# Altium PCB HX-SMJ-02.pcbdoc
Units mm, origin at the board's own origin, x right, y up, seen from the top; angles counter-clockwise.
Board outline 105.79 x 116.08 mm, 2 copper layers (Top Layer, Bottom Layer); 78 components, 54 nets, 295 pads, 193 vias.
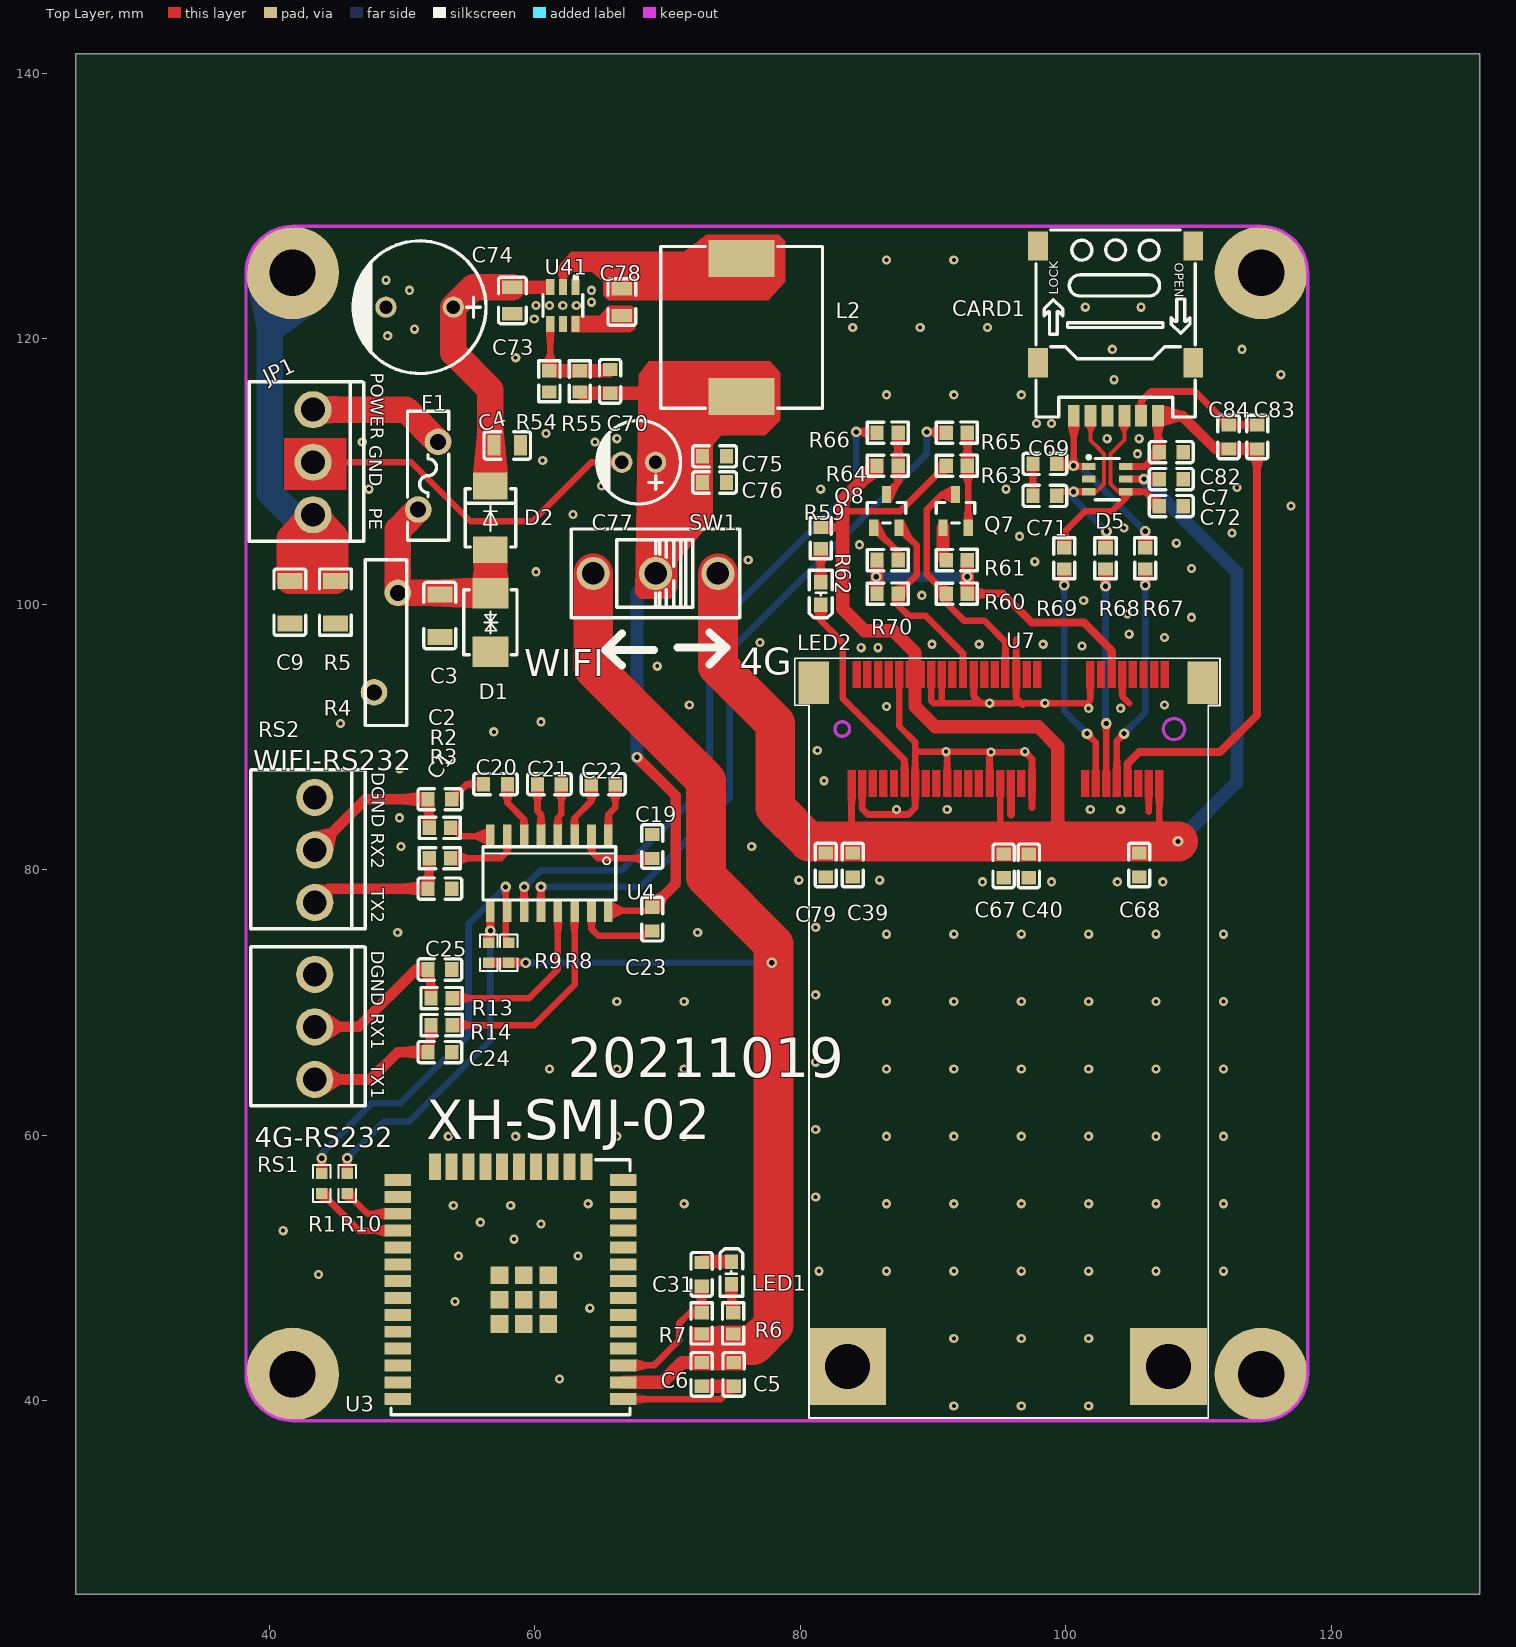
[diagram p0: Top Layer view]
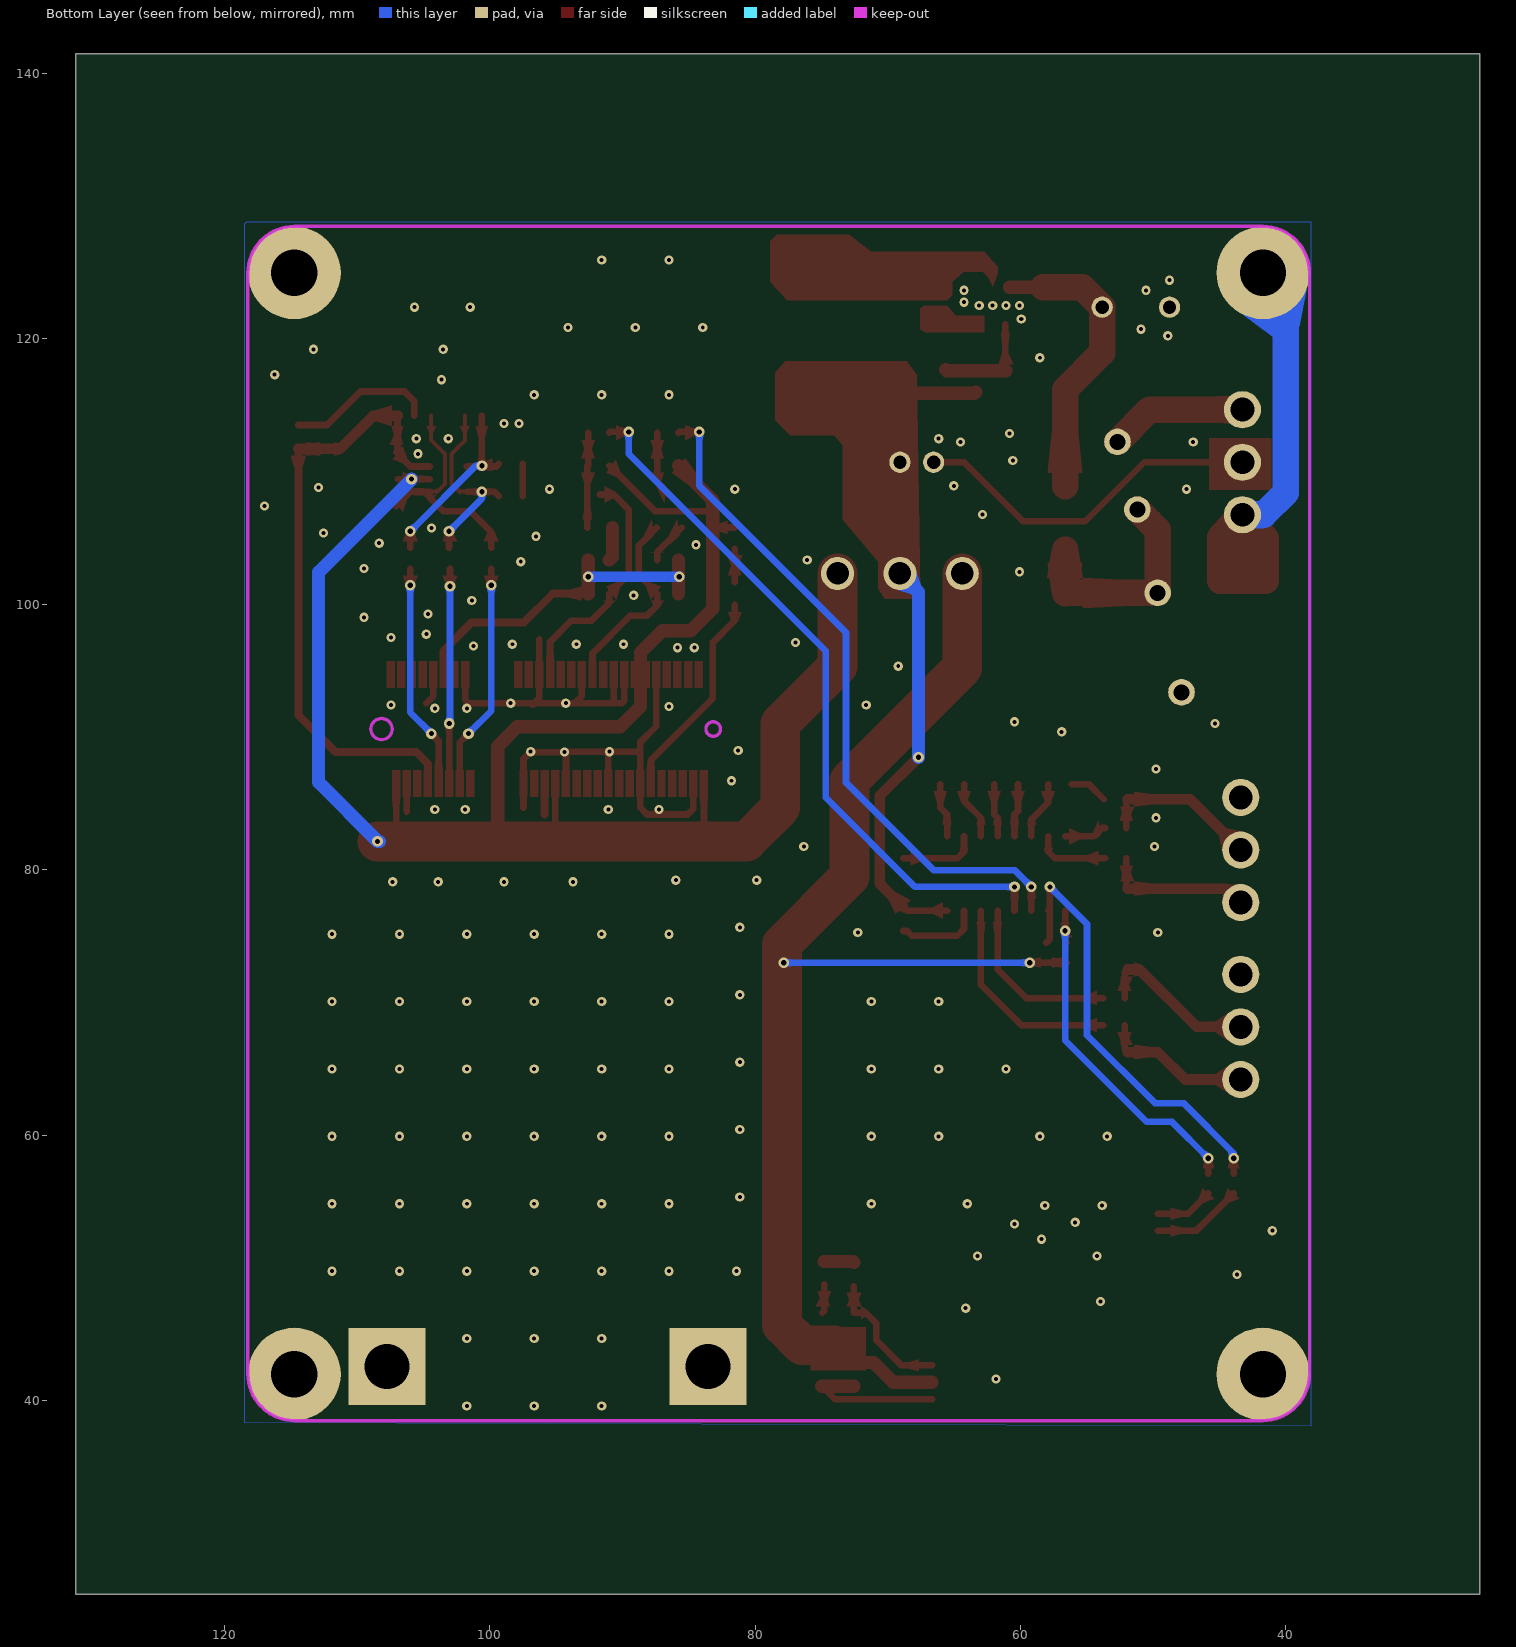
[diagram p1: Bottom Layer view, seen from below]

## Layer stack, top to bottom
Top Layer: signal copper (thickness not stored)
Dielectric: dielectric 0.32, FR-4, Dk 4.8
Bottom Layer: signal copper (thickness not stored)

## Board outline
131.191,25.4 25.4,25.4 25.4,141.478 131.191,141.478

## Components (designator, comment, footprint, x,y, rotation, side; value= is the part's Value field where it differs from the comment)
C1 "11pF" C0603 52.832,78.57 r0 top
C2 "11pF" C0603 52.832,85.301 r0 top
C3 "1nF/2kv" C1206 52.832,99.144 r90 top
C4 "100nF/50v" C0805 57.912,111.971 r180 top
C5 "100nF" C0603 74.97,41.966 r90 top
C6 "33pF" C0603 72.557,41.966 r90 top
C7 "100nF" C0603 107.95,109.431 r180 top
C9 "1nF/2kv" C1206 41.529,100.16 r270 top
C19 "100nF" C0603 68.834,81.745 r90 top
C20 "100nF" C0603 57.023,86.444 r0 top
C21 "100nF" C0603 61.087,86.444 r0 top
C22 "100nF" C0603 65.151,86.444 r180 top
C23 "100nF" C0603 68.834,76.274 r270 top
C24 "11pF" C0603 52.832,66.251 r0 top
C25 "11pF" C0603 52.832,72.474 r0 top
C31 "1uF" C0603 72.557,49.499 r270 top
C39 "100nF" C0603 83.947,80.348 r90 top
C40 "100nF" C0603 97.218,80.285 r90 top
C67 "100nF" C0603 95.313,80.285 r90 top
C68 "100nF" C0603 105.537,80.348 r90 top
C69 "33pF/50V" C0603 98.425,110.574 r0 top
C70 "68pF" C0603 65.659,116.797 r270 top
C71 "33pF/50V" C0603 98.425,108.161 r0 top
C72 "33pF/50V" C0603 107.95,107.399 r180 top
C73 "100nF/50v" C0805 58.293,122.893 r270 top
C74 "220uF/50V" CAP-TH_BD10.0-P5.00-D1.0-FD 51.308,122.385 r180 top
C75 "1nF" C0603 73.533,111.146 r180 top
C76 "100nF" C0603 73.533,109.177 r180 top
C77 "220uF/16v" CAP-TH_BD6.3-P2.50-D1.0-FD 67.818,110.701 r180 top
C78 "100nF/50v" C0805 66.548,122.766 r270 top
C79 "100nF" C0603 81.915,80.348 r90 top
C82 "33pF" C0603 107.95,111.463 r180 top
C83 "1nF" C0603 114.427,112.606 r270 top
C84 "100nF" C0603 112.268,112.606 r270 top
CARD1 "SIM-1305-6P" SIM-SMD_SIM-1305-6P 103.759,120.607 r180 top
D1 "P6SMB24CA" SMB_L4.6-W3.6-LS5.3-BI 56.642,98.636 r90 top
D2 "SS56BF" SMBF_L4.3-W3.6-LS5.3-RD 56.642,106.51 r270 top
D5 "SRV05-4" SOT-23-6_L2.9-W1.6-P0.95-LS2.8-BL 103.128,109.431 r270 top
F1 "JK30-160" FUSE-TH_L9.7-W3.1-P5.10-D0.6-S1.50 51.943,109.685 r270 top
JP1 "VH3.96-3A" CONN-TH_3P-P3.96_VH3.96-3A 43.28,110.701 r270 top
L2 "15uH/4.5A" IND-SMD_L12.2-W12.2_MS127 75.565,120.861 r270 top
LED1 "BL-HUB36G-AV-TRB" LED0603-R-RD 74.803,49.614 r270 top
LED2 "BL-HUB36G-AV-TRB" LED0603-R-RD 81.534,100.795 r90 top
Q7 "SS8050" SOT-23-3_L2.9-W1.6-P1.90-LS2.8-BR 91.695,107.018 r270 top
Q8 "SS8050" SOT-23-3_L2.9-W1.6-P1.90-LS2.8-BR 86.487,107.018 r270 top
R1 "499" R0603#1 43.942,56.345 r90 top
R2 "33R" R0603#2 52.832,83.142 r0 top
R3 "33R" R0603#2 52.832,80.856 r0 top
R4 "390KD10" RES-TH_L12.5-W3.1-P7.50-D1.2-S1.80 48.768,97.112 r90 top
R5 "1M" R1206 44.958,100.16 r270 top
R6 "2K" R0603#2 74.93,45.804 r270 top
R7 "10K" R0603#2 72.557,45.804 r270 top
R8 "10K" R0603#1 58.039,73.744 r270 top
R9 "10K" R0603#1 56.515,73.744 r270 top
R10 "33" R0603#1 45.847,56.345 r90 top
R13 "33R" R0603#2 52.959,70.315 r0 top
R14 "33R" R0603#2 52.959,68.283 r0 top
R54 "22K 1%" R0603#2 61.087,116.797 r90 top
R55 "100K 1%" R0603#2 63.373,116.797 r270 top
R59 "2K" R0603#2 81.534,104.986 r90 top
R60 "10K" R0603#2 91.785,100.795 r0 top
R61 "4.7K" R0603#2 91.785,103.33 r0 top
R62 "4.7K" R0603#2 86.578,103.335 r180 top
R63 "10K" R0603#2 91.785,110.447 r180 top
R64 "10K" R0603#2 86.578,110.447 r180 top
R65 "33R" R0603#2 91.785,112.926 r0 top
R66 "33R" R0603#2 86.577,112.926 r0 top
R67 "22R" R0603#2 105.987,103.462 r90 top
R68 "22R" R0603#2 102.997,103.462 r90 top
R69 "22R" R0603#2 99.891,103.462 r90 top
R70 "10K" R0603#2 86.577,100.795 r0 top
RS1 "VH3.96-3A" CONN-TH_3P-P3.96_VH3.96-3A 43.407,68.146 r270 top
RS2 "VH3.96-3A" CONN-TH_3P-P3.96_VH3.96-3A 43.407,81.481 r270 top
SW1 "SS-12D10L4" SW-TH_SS-12D10L3 69.088,102.319 r180 top
U3 "ESP32-WROOM-32UE(4MB)" WIFI-SMD_ESP32-WROOM-32UE 58.166,48.852 r180 top
U4 "MAX3232EID" SOIC16N 61.087,79.713 r180 top
U7 "EC20 R2.1 Mini PCIe-C" 3G/4G模块_PCI 95.631,67.267 r270 top
U41 "TPS54302DDCR" TSOT-23-6_L2.9-W1.6-P0.95-LS2.8-BL 62.103,122.512 r180 top

## Footprints (in the part's own frame and the unit in brackets; to place one, negate y for a bottom-side part, rotate by r counter-clockwise, add the part's x,y. Pads: shape width x height; smd on the part's side, far side on the other; paste and mask are expansions set on the pad)
3G/4G模块_PCI [mil]
  rect 125.98x90.55 smd: 0(-1056.2,-575.8) 0(-1056.2,577.75)
  rect 228.35x228.35 hole 133.86: 0(973.3,477.35) 0(973.3,-475.4)
  round 0 smd: 1(-1079.83,465.56) 2(-757,449.81) 3(-1079.83,434.06) 4(-757,418.32) 5(-1079.83,402.57) 6(-757,386.82) 7(-1079.83,371.07) 8(-757,355.32) 9(-1079.83,339.58) 10(-757,323.83) 11(-1079.83,308.08) 12(-757,292.33) 13(-1079.83,276.58) 14(-757,260.84) 15(-1079.83,245.09) 16(-757,229.34) 17(-1079.83,87.61) 18(-757,71.86) 19(-1079.83,56.11) 20(-757,40.36) 21(-1079.83,24.62) 22(-757,8.87) 23(-1079.83,-6.88) 24(-757,-22.63) 25(-1079.83,-38.38) 26(-757,-54.12) 27(-1079.83,-69.87) 28(-757,-85.62) 29(-1079.83,-101.37) 30(-757,-117.12) 31(-1079.83,-132.87) 32(-757,-148.61) 33(-1079.83,-164.36) 34(-757,-180.11) 35(-1079.83,-195.86) 36(-757,-211.61) 37(-1079.83,-227.35) 38(-757,-243.1) 39(-1079.83,-258.85) 40(-757,-274.6) 41(-1079.83,-290.35) 42(-757,-306.09) 43(-1079.83,-321.84) 44(-757,-337.59) 45(-1079.83,-353.34) 46(-757,-369.09) 47(-1079.83,-384.83) 48(-757,-400.58) 49(-1079.83,-416.33) 50(-757,-432.08) 51(-1079.83,-447.83) 52(-757,-463.57)
  Top Layer region: -717.6,343.5 -796.4,343.5 -796.4,367.1 -717.6,367.1
  Top Layer region: -717.6,249 -796.4,249 -796.4,272.7 -717.6,272.7
  Top Layer region: -717.6,312 -796.4,312 -796.4,335.6 -717.6,335.6
  Top Layer region: -717.6,280.5 -796.4,280.5 -796.4,304.1 -717.6,304.1
  Top Layer region: -717.6,-223.4 -796.4,-223.4 -796.4,-199.8 -717.6,-199.8
  Top Layer region: -717.6,-254.9 -796.4,-254.9 -796.4,-231.3 -717.6,-231.3
  Top Layer region: -717.6,-380.9 -796.4,-380.9 -796.4,-357.3 -717.6,-357.3
  Top Layer region: -717.6,-349.4 -796.4,-349.4 -796.4,-325.8 -717.6,-325.8
  Top Layer region: -717.6,-128.9 -796.4,-128.9 -796.4,-105.3 -717.6,-105.3
  Top Layer region: -717.6,-160.4 -796.4,-160.4 -796.4,-136.8 -717.6,-136.8
  Top Layer region: -1040.5,75.8 -1119.2,75.8 -1119.2,99.4 -1040.5,99.4
  Top Layer region: -1040.5,-50.2 -1119.2,-50.2 -1119.2,-26.6 -1040.5,-26.6
  Top Layer region: -1040.5,-144.7 -1119.2,-144.7 -1119.2,-121.1 -1040.5,-121.1
  Top Layer region: -1040.5,-176.2 -1119.2,-176.2 -1119.2,-152.5 -1040.5,-152.5
  Top Layer region: -1040.5,-18.7 -1119.2,-18.7 -1119.2,4.9 -1040.5,4.9
  Top Layer region: -717.6,-2.9 -796.4,-2.9 -796.4,20.7 -717.6,20.7
  Top Layer region: -1040.5,264.8 -1119.2,264.8 -1119.2,288.4 -1040.5,288.4
  Top Layer region: -1040.5,296.3 -1119.2,296.3 -1119.2,319.9 -1040.5,319.9
  Top Layer region: -1040.5,422.3 -1119.2,422.3 -1119.2,445.9 -1040.5,445.9
  Top Layer region: -717.6,-317.9 -796.4,-317.9 -796.4,-294.3 -717.6,-294.3
  Top Layer region: -717.6,217.5 -796.4,217.5 -796.4,241.2 -717.6,241.2
  Top Layer region: -1040.5,44.3 -1119.2,44.3 -1119.2,67.9 -1040.5,67.9
  Top Layer region: -717.6,28.6 -796.4,28.6 -796.4,52.2 -717.6,52.2
  Top Layer region: -717.6,-34.4 -796.4,-34.4 -796.4,-10.8 -717.6,-10.8
  Top Layer region: -717.6,-97.4 -796.4,-97.4 -796.4,-73.8 -717.6,-73.8
  Top Layer region: -1040.5,-365.1 -1119.2,-365.1 -1119.2,-341.5 -1040.5,-341.5
  Top Layer region: -1040.5,-396.6 -1119.2,-396.6 -1119.2,-373 -1040.5,-373
  Top Layer region: -717.6,-412.4 -796.4,-412.4 -796.4,-388.8 -717.6,-388.8
  Top Layer region: -1040.5,-428.1 -1119.2,-428.1 -1119.2,-404.5 -1040.5,-404.5
  Top Layer region: -1040.5,-459.6 -1119.2,-459.6 -1119.2,-436 -1040.5,-436
  Top Layer region: -717.6,-443.9 -796.4,-443.9 -796.4,-420.3 -717.6,-420.3
  Top Layer region: -1040.5,-333.6 -1119.2,-333.6 -1119.2,-310 -1040.5,-310
  Top Layer region: -717.6,-286.4 -796.4,-286.4 -796.4,-262.8 -717.6,-262.8
  Top Layer region: -1040.5,-239.2 -1119.2,-239.2 -1119.2,-215.5 -1040.5,-215.5
  Top Layer region: -1040.5,-207.7 -1119.2,-207.7 -1119.2,-184 -1040.5,-184
  Top Layer region: -717.6,-191.9 -796.4,-191.9 -796.4,-168.3 -717.6,-168.3
  Top Layer region: -1040.5,-113.2 -1119.2,-113.2 -1119.2,-89.6 -1040.5,-89.6
  Top Layer region: -1040.5,-81.7 -1119.2,-81.7 -1119.2,-58.1 -1040.5,-58.1
  Top Layer region: -717.6,-65.9 -796.4,-65.9 -796.4,-42.3 -717.6,-42.3
  Top Layer region: -1040.5,12.8 -1119.2,12.8 -1119.2,36.4 -1040.5,36.4
  Top Layer region: -717.6,60.1 -796.4,60.1 -796.4,83.7 -717.6,83.7
  Top Layer region: -1040.5,233.3 -1119.2,233.3 -1119.2,256.9 -1040.5,256.9
  Top Layer region: -1040.5,327.8 -1119.2,327.8 -1119.2,351.4 -1040.5,351.4
  Top Layer region: -717.6,406.5 -796.4,406.5 -796.4,430.1 -717.6,430.1
  Top Layer region: -1040.5,390.8 -1119.2,390.8 -1119.2,414.4 -1040.5,414.4
  Top Layer region: -1040.5,359.3 -1119.2,359.3 -1119.2,382.9 -1040.5,382.9
  Top Layer region: -717.6,-475.4 -796.4,-475.4 -796.4,-451.8 -717.6,-451.8
  Top Layer region: -1040.5,-302.2 -1119.2,-302.2 -1119.2,-278.5 -1040.5,-278.5
  Top Layer region: -1040.5,-270.7 -1119.2,-270.7 -1119.2,-247 -1040.5,-247
  Top Layer region: -717.6,438 -796.4,438 -796.4,461.6 -717.6,461.6
  Top Layer region: -717.6,375 -796.4,375 -796.4,398.6 -717.6,398.6
  Top Layer region: -1040.5,453.8 -1119.2,453.8 -1119.2,477.4 -1040.5,477.4
  Keep-Out Layer lines w10: -940.07,-491.13 ccw(c-918.42,-491.11) -939.73,-487.29 ; -949.91,493.12 ccw(c-918.41,493.12) -949.41,498.71
  silkscreen extent -1128,-632 1126,630
C0603 [mm]
  rect 1x1.1 smd: 1(-0.9,0) 2(0.9,0)
  silkscreen extent -1.65,-0.8 1.65,0.8
C0805 [mm]
  rect 1x1.55 smd: 1(-1,0) 2(1,0)
  silkscreen extent -1.75,-1.04 1.75,1.04
C1206 [mm]
  rect 1.2x1.9 smd: 1(-1.6,0) 2(1.6,0)
  silkscreen extent -2.5,-1.2 2.5,1.2
CAP-TH_BD6.3-P2.50-D1.0-FD [mm]
  round 1.6 hole 1: 1(-1.27,0) 2(1.27,0)
  silkscreen extent -3.15,-3.15 3.17,3.15
CAP-TH_BD10.0-P5.00-D1.0-FD [mm]
  round 1.6 hole 1: 1(-2.54,0) 2(2.54,0)
  silkscreen extent -5,-5 5.08,5
CONN-TH_3P-P3.96_VH3.96-3A [mm]
  round 2.8 hole 1.8: 1(-3.961,0) 2(-0.001,0) 3(3.961,0)
  silkscreen extent -6.05,-4.83 5.94,3.81
FUSE-TH_L9.7-W3.1-P5.10-D0.6-S1.50 [mm]
  round 2 hole 1.2: 1(-2.55,0.75) 2(2.55,-0.75)
  silkscreen extent -4.85,-1.55 4.85,1.55
IND-SMD_L12.2-W12.2_MS127 [mm]
  rect 2.8x5 smd: 1(-5.2,0) 2(5.2,0)
  silkscreen extent -6.1,-6.1 6.1,6.1
LED0603-R-RD [mil]
  rect 43x39 smd: 1(33.5,0) 2(-33.5,0)
  silkscreen extent -72,-34 70,34
R0603#1 [mm]
  rect 0.806x0.864 smd: 1(-0.753,0) 2(0.753,0)
  silkscreen extent -1.39,-0.66 1.39,0.66
R0603#2 [mm]
  rect 1x1.1 smd: 1(-0.8,0) 2(0.8,0)
  silkscreen extent -1.55,-0.8 1.55,0.81
R1206 [mm]
  rect 1.2x1.9 smd: 1(-1.6,0) 2(1.6,0)
  silkscreen extent -2.5,-1.2 2.5,1.2
RES-TH_L12.5-W3.1-P7.50-D1.2-S1.80 [mm]
  round 2 hole 1.2: 1(-3.749,0.899) 2(3.749,-0.899)
  silkscreen extent -6.25,-1.56 6.25,1.55
SIM-SMD_SIM-1305-6P [mm]
  rect 1.5x2.2 smd: 7(-5.85,2.401) 8(5.85,2.401) 9(5.85,-6.399) 10(-5.85,-6.399)
  rect 0.9x1.6 smd: C1(-3.193,6.399) C2(-0.653,6.399) C3(1.887,6.399) C5(-1.923,6.399) C6(0.617,6.399) C7(3.157,6.399)
  silkscreen extent -6,-7.6 6,6.5
SMB_L4.6-W3.6-LS5.3-BI [mm]
  rect 2.3x2.7 smd: 1(-2.2,0) 2(2.2,0)
  silkscreen extent -2.45,-2 2.45,2
SMBF_L4.3-W3.6-LS5.3-RD [mm]
  rect 2x2.6 smd: 1(-2.4,0) 2(2.4,0)
  silkscreen extent -2.2,-1.9 2.2,1.9
SOIC16N [mm]
  rect 0.65x1.75 smd: 1(-4.445,-2.799) 2(-3.175,-2.799) 3(-1.905,-2.799) 4(-0.635,-2.799) 5(0.635,-2.799) 6(1.905,-2.799) 7(3.175,-2.799) 8(4.445,-2.799) 9(4.445,2.799) 10(3.175,2.799) 11(1.905,2.799) 12(0.635,2.799) 13(-0.635,2.799) 14(-1.905,2.799) 15(-3.175,2.799) 16(-4.445,2.799)
  silkscreen extent -5,-2 5,2
SOT-23-3_L2.9-W1.6-P1.90-LS2.8-BR [mm]
  rect 1.25x0.7 smd: 1(1.25,-0.95) 2(1.25,0.95) 3(-1.25,0)
  silkscreen extent -0.65,-1.46 0.9,1.46
SOT-23-6_L2.9-W1.6-P0.95-LS2.8-BL [mm]
  rect 0.55x1 smd: 1(-0.95,-1.4) 2(0,-1.4) 3(0.95,-1.4) 4(0.95,1.4) 5(0,1.4) 6(-0.95,1.4)
  silkscreen extent -1.78,-1.52 1.55,0.9
SW-TH_SS-12D10L3 [mm]
  round 2.5 hole 1.7: 1(-4.7,0) 2(0,0) 3(4.7,0)
  silkscreen extent -6.35,-3.35 6.35,3.35
TSOT-23-6_L2.9-W1.6-P0.95-LS2.8-BL [mil]
  rect 24.5x48 smd: 1(-37.4,-55.12) 2(0,-55.12) 3(37.4,-55.12) 4(37.4,55.12) 5(0,55.12) 6(-37.4,55.12)
  silkscreen extent -59,-89 59,31
WIFI-SMD_ESP32-WROOM-32UE [mm]
  rect 2x0.9 smd: 1(-8.5,8.755) 2(-8.5,7.485) 3(-8.5,6.215) 4(-8.5,4.945) 5(-8.5,3.675) 6(-8.5,2.405) 7(-8.5,1.135) 8(-8.5,-0.135) 9(-8.5,-1.405) 10(-8.5,-2.675) 11(-8.5,-3.945) 12(-8.5,-5.215) 13(-8.5,-6.485) 14(-8.5,-7.755) 25(8.5,-7.755) 26(8.5,-6.485) 27(8.5,-5.215) 28(8.5,-3.945) 29(8.5,-2.675) 30(8.5,-1.405) 31(8.5,-0.135) 32(8.5,1.135) 33(8.5,2.405) 34(8.5,3.675) 35(8.5,4.945) 36(8.5,6.215) 37(8.5,7.485) 38(8.5,8.755)
  rect 0.9x2 smd: 15(-5.715,-8.755) 16(-4.445,-8.755) 17(-3.175,-8.755) 18(-1.905,-8.755) 19(-0.635,-8.755) 20(0.635,-8.755) 21(1.905,-8.755) 22(3.175,-8.755) 23(4.445,-8.755) 24(5.715,-8.755)
  rect 1.33x1.33 smd: 39(-2.835,3.09) 39(-2.835,-0.58) 39(-2.835,1.255) 39(-1,3.09) 39(-1,1.255) 39(-1,-0.58) 39(0.835,3.09) 39(0.835,1.255) 39(0.835,-0.58)
  silkscreen extent -9,-9.27 9.02,9.95

## Free pads (board coordinates)
  round 7 hole 3.5: 1(41.727,41.981) 1(41.727,124.981) 1(114.727,41.981) 1(114.727,124.981)

## Via types
v1: diameter 0.7, hole 0.3, Top Layer to Bottom Layer, 161 vias
v2: diameter 0.8, hole 0.4, Top Layer to Bottom Layer, 25 vias
v3: diameter 0.7, hole 0.305, Top Layer to Bottom Layer, 7 vias

## Nets (pads, with @x,y where several pads share a name; then routed paths per layer and width w, separated by ;. In a path a pad name is that pad's centre, name@x,y a point inside that pad or via, vN(x,y) a via of type N, cw(c..) or ccw(c..) an arc to the next point about the centre after c; other vN are vias at no path point)
4G_3V3_RXD: R65.1 U4.12 | length 54
  Top Layer w0.5: U4.12 v2(60.452,78.697) ; v2(89.535,112.987) 90.924,112.987 R65.1
  Bottom Layer w0.5: v2(60.452,78.697) 67.945,78.697 74.676,85.428 74.676,96.477 89.535,111.336 v2(89.535,112.987)
4G_3V3_TXD: R66.1 U4.11 | length 51.6
  Top Layer w0.5: U4.11 v2(59.182,78.697) ; v2(84.201,112.987) 85.717,112.987 R66.1
  Bottom Layer w0.5: v2(59.182,78.697) 60.452,79.967 66.548,79.967 73.152,86.571 73.152,97.874 84.201,108.923 v2(84.201,112.987)
C19_1: C19.1 U4.2 | length 5.9
  Top Layer w0.5: U4.2 64.262,81.354 64.77,80.846 C19.1
C20_2: C20.2 U4.6 | length 4.5
  Top Layer w0.5: C20.2 57.922,85.037 59.182,83.777 U4.6
C21_1: C21.1 U4.5 | length 4
  Top Layer w0.5: C21.1 60.188,84.422 60.452,84.158 U4.5
C21_2: C21.2 U4.4 | length 4
  Top Layer w0.5: U4.4 61.722,83.904 61.986,84.168 C21.2
C22_1: C22.1 U4.1 | length 4.1
  Top Layer w0.5: U4.1 65.532,84.158 66.05,84.676 C22.1
C22_2: C22.2 U4.3 | length 4.5
  Top Layer w0.5: U4.3 62.992,83.904 64.252,85.164 C22.2
C70_1: C70.1 R54.2 R55.1 U41.4 | length 8.2
  Top Layer w0.5: R54.2 61.153,117.663 U41.4
  Top Layer w1: R54.2 65.56,117.597 C70.1
CLK: C71.2 CARD1.C3 D5.3 R68.2 | length 14.9
  Top Layer w0.3: D5.3 102.304,108.481 102.873,109.05 102.873,111.336 102.385,111.826 ; CARD1.C3 101.872,112.337 102.489,111.722
  Top Layer w0.5: C71.2 99.644,108.481 100.592,108.481 D5.3 ; R68.2@103.066,104.262 v2(103.066,105.494)
  Bottom Layer w0.5: v2@100.592,108.481 100.592,107.971 v2(103.066,105.494)
  other v2: 100.59,108.481
DATA: C69.2 CARD1.C7 D5.1 R67.2 | length 16.1
  Top Layer w0.5: C69.2 99.517,110.381 D5.1 100.65,110.381 v2(100.584,110.447) 100.602,110.465 CARD1.C7 ; R67.2 v2(105.987,105.494)
  Bottom Layer w0.5: v2(100.584,110.447) 101.034,110.447 v2(105.987,105.494)
DGND: C1.2 C2.2 C3.1 C4.1 C5.1 C6.1 C7.1 C9.2 C19.2 C20.1 C23.2 C24.2 C25.2 C31.1 C39.1 C40.1 C67.1 C68.1 C69.1 C71.1 C72.1 C73.2 C74.2 C75.1 C76.1 C77.2 C79.1 C82.1 C83.1 C84.1 CARD1.7 CARD1.8 CARD1.9 CARD1.10 CARD1.C5 D1.1 D5.2 JP1.2 LED1.2 R4.1 R5.2 R54.1 RS1.1 RS2.1 U3.1 U3.15 U3.38 U3.39 U4.15 U7.4 U7.9 U7.15 U7.18 U7.21 U7.26 U7.27 U7.29 U7.34 U7.35 U7.37 U7.40 U7.43 U7.50 U41.1 | length 127.6
  Top Layer w0.5: JP1.2 50.672,110.702 55.118,106.256 59.817,106.256 64.262,110.701 C77.2 ; C2.2 54.874,86.444 C20.1 ; U4.15 64.262,75.522 64.77,75.014 68.199,75.014 68.56,75.375 C23.2 ; U3.1 74,40.097 C5.1@74.971,41.064 ; U7.50 84.656,84.592 85.09,84.158 88.138,84.158 88.656,84.676 U7.40 ; U7.43 87.457,90.808 88.646,89.619 88.646,86.495 ; 88.646,88.893 v1(90.982,88.893) ; 89.858,94.694 89.858,92.728 90.043,92.54 v1(94.27,92.54) v1(98.425,92.54) 101.605,92.54 101.857,92.792 U7.15 ; 90.655,92.54 U7.35 ; v1(90.982,88.893) 94.325,88.893 v1(94.361,88.857) ; U7.34 v1@91.056,88.857 ; U7.29 93.055,93.084 93.472,92.667 ; U7.26 94.257,88.753 v1(94.361,88.857) ; v1@94.256,88.893 94.293,88.857 v1(94.361,88.857) ; 96.256,97.366 U7.21 96.256,92.931 96.774,92.413 ; v1(96.912,88.893) 97.457,88.349 U7.18 97.457,84.666 ; v1(96.912,88.893) 96.876,88.857 v1(94.361,88.857) ; C71.1 C69.1 ; U7.9 104.257,93.058 104.775,92.54 ; CARD1.C5 105.682,115.291 106.426,116.035 109.738,116.035 C84.1 C83.1 ; 106.256,84.369 U7.4
  Top Layer w1: C6.1@72.558,41.064 C5.1@74.971,41.064 ; C31.1 72.624,50.465 LED1.2
  other v1: 91.567,39.581 96.647,39.581 101.727,39.581 61.849,41.613 91.567,44.661 96.647,44.661 101.727,44.661 64.135,46.947 53.975,47.455 43.688,49.487 81.407,49.741 86.487,49.741 91.567,49.741 96.647,49.741 101.727,49.741 106.807,49.741 111.887,49.741 54.229,50.884 63.246,50.884 58.42,52.154 41.021,52.789 60.452,53.297 55.88,53.424 53.848,54.694 58.166,54.694 64.008,54.821 71.247,54.821 86.487,54.821 91.567,54.821 96.647,54.821 101.727,54.821 106.807,54.821 111.887,54.821 81.153,55.329 53.467,59.901 58.547,59.901 66.167,59.901 71.247,59.901 86.487,59.901 91.567,59.901 96.647,59.901 101.727,59.901 106.807,59.901 111.887,59.901 81.153,60.409 61.087,64.981 66.167,64.981 71.247,64.981 86.487,64.981 91.567,64.981 96.647,64.981 101.727,64.981 106.807,64.981 111.887,64.981 81.153,65.489 66.167,70.061 71.247,70.061 86.487,70.061 91.567,70.061 96.647,70.061 101.727,70.061 106.807,70.061 111.887,70.061 81.153,70.569 86.487,75.141 91.567,75.141 96.647,75.141 101.727,75.141 106.807,75.141 111.887,75.141 49.657,75.268 72.263,75.268 81.153,75.649 93.726,79.078 98.933,79.078 103.886,79.078 107.315,79.078 79.883,79.205 85.979,79.205 49.911,81.745 76.327,81.745 49.784,83.904 87.249,84.539 91.059,84.539 101.854,84.539 104.14,84.539 81.788,86.698 49.784,87.587 81.28,88.984 56.896,90.381 45.339,91.016 60.452,91.143 101.727,92.159 104.14,92.159 86.487,92.286 71.628,92.413 107.442,92.413 69.215,95.334 84.582,96.731 85.852,96.731 101.219,96.858 89.916,96.985 93.472,96.985 98.298,96.985 76.962,97.112 107.442,97.493 104.775,97.747 109.474,99.017 104.648,99.271 101.346,100.287 89.154,100.668 60.071,102.446 109.474,102.7 97.663,103.208 76.073,103.335 84.455,104.478 108.331,104.605 96.52,105.113 112.522,105.367 104.394,105.748 62.865,106.764 116.967,107.399 47.498,108.669 81.534,108.669 95.504,108.669 112.903,108.796 65.024,108.923 60.579,110.828 105.41,111.336 46.99,112.225 64.516,112.225 66.167,112.479 103.124,112.479 105.537,112.479 60.833,112.86 97.79,113.622 98.933,113.622 86.487,115.781 91.567,115.781 96.647,115.781 103.632,116.924 116.205,117.305 58.547,118.575 103.505,119.21 113.284,119.21 48.895,120.226 50.927,120.734 83.947,120.861 89.027,120.861 94.107,120.861 101.473,122.385 105.664,122.385 50.546,123.655 48.768,124.417 86.487,125.941 91.567,125.941
  other v3: 59.944,121.496 60.071,122.512 61.087,122.512 62.103,122.512 63.119,122.512 64.262,122.766 64.262,123.655
EC20_RXD_1V8: Q7.3 R60.1 U7.23 | length 18.4
  Top Layer w0.5: Q7.3 90.658,108.268 89.535,107.145 89.535,102.245 R60.1 90.985,100.107 92.329,98.763 93.853,98.763 95.456,97.16 U7.23
EC20_TXD_1V8: Q8.2 R70.2 U7.31 | length 15
  Top Layer w0.5: Q8.2 88.773,104.432 88.773,102.192 R70.2 87.376,99.906 88.138,99.144 89.408,99.144 92.255,96.297 U7.31
EC20_VDD_EXT: R60.2 R61.2 R62.2 R70.1 U7.11 | length 26.4
  Top Layer w0.6: R60.2 95.253,100.795 97.432,98.616 101.366,98.616 103.457,96.525 U7.11
  Top Layer w1: R70.1 R62.2 ; R60.2 R61.2
  Bottom Layer w0.8: v2(85.725,102.065) v2(92.583,102.065)
F1_2: C3.2 D1.2 D2.2 F1.2 R4.2 | length 17.2
  Top Layer w2: F1.2 49.667,105.608 R4.2 56.617,100.861 D1.2 D2.2
JP1_1: F1.1 JP1.1 | length 10.4
  Top Layer w2: JP1.1 50.266,114.662 F1.1
LED1_1: LED1.1 R6.1 | length 2.2
  Top Layer w0.5: LED1.1 74.803,46.731 R6.1
LED2_2: LED2.2 U7.42 | length 16.1
  Top Layer w0.5: LED2.2 81.534,98.763 83.185,97.112 83.185,92.921 87.856,88.25 U7.42
PGND: C9.1 JP1.3 pad.1@41.727,124.981 R5.1 | length 41
  Top Layer w2: 43.28,101.76 JP1.3 ; C9.1 41.529,104.989 JP1.3 44.958,105.062 R5.1 C9.1
  Bottom Layer w2: pad.1@41.727,124.981 40.005,123.259 40.005,108.415 41.679,106.741 JP1.3
Q8_1: Q8.1 R62.1 | length 3.2
  Top Layer w0.5: Q8.1 87.379,103.927 R62.1
R13_2: R13.2 U4.13 | length 13.3
  Top Layer w0.5: R13.2 59.563,70.315 61.722,72.474 U4.13
R14_2: R14.2 U4.14 | length 16.1
  Top Layer w0.5: R14.2 59.944,68.283 62.992,71.331 U4.14
R59_1: LED2.1 R59.1 | length 2.5
  Top Layer w0.5: LED2.1 R59.1
R61_1: Q7.1 R61.1 | length 2.5
  Top Layer w1: Q7.1 90.744,103.569 R61.1
R65_2: Q7.2 R63.1 R65.2 | length 7.2
  Top Layer w0.5: R65.2 R63.1 92.644,110.447 Q7.2
R66_2: Q8.3 R64.1 R66.2 | length 5
  Top Layer w0.5: Q8.3 87.379,109.159 R64.1 R66.2
RST: C72.2 CARD1.C2 D5.4 R69.2 | length 17.3
  Top Layer w0.3: CARD1.C2 104.412,112.367 103.381,111.336 103.381,109.05 103.95,108.481 D5.4
  Top Layer w0.5: R69.2 99.891,105.436 101.473,107.018 103.505,107.018 104.529,108.042 D5.4 105.697,108.481 105.969,108.481 C72.2
RX1: C25.1 R13.1 RS1.2 | length 12.6
  Top Layer w0.5: C25.1 52.159,72.248 R13.1
  Top Layer w0.8: RS1.2 46.728,68.148 51.054,72.474 C25.1
RX2: C2.1 R2.1 RS2.2 | length 12.3
  Top Layer w0.5: C2.1 52.032,85.202 R2.1
  Top Layer w0.8: RS2.2 47.226,85.301 C2.1
S$8: 
S$28: 
S$10309: 
S$10311: 
S$10313: 
TX1: C24.1 R14.1 RS1.3 | length 11.5
  Top Layer w0.5: C24.1 52.159,66.477 R14.1
  Top Layer w0.8: RS1.3 47.592,64.186 49.657,66.251 C24.1
TX2: C1.1 R3.1 RS2.3 | length 11.3
  Top Layer w0.5: C1.1 52.032,78.669 R3.1
  Top Layer w0.8: RS2.3 44.458,78.57 C1.1
U3_3: C31.2 R7.1 U3.3 | length 10.3
  Top Layer w0.5: U3.3 68.969,42.637 70.866,44.534 70.866,45.804 71.666,46.604 R7.1 C31.2
U3_27: R10.1 U3.27 | length 4.4
  Top Layer w0.5: R10.1@45.847,55.591 47.371,54.067 U3.27@49.665,54.067
U3_28: R1.1 U3.28 | length 6.9
  Top Layer w0.5: R1.1@43.942,55.591 46.736,52.797 U3.28@49.665,52.797
U4_7: R3.2 U4.7 | length 5.6
  Top Layer w0.5: R3.2 57.419,80.856 57.912,81.349 U4.7
U4_8: R2.2 U4.8 | length 3.3
  Top Layer w0.5: R2.2 53.848,83.142 54.478,82.512 U4.8
U41_2: C78.1 L2.1 U41.2
U41_6: C78.2 U41.6
USIM_CLK: R68.1 U7.12 | length 16.2
  Top Layer w0.5: v2(102.997,101.361) R68.1 ; U7.12 v2(103.056,91.016)
  Bottom Layer w0.5: v2(102.997,101.361) 102.997,91.075 v2(103.056,91.016)
USIM_DATA: R67.1 U7.10 | length 17
  Top Layer w0.5: U7.10 103.856,89.492 ; 103.856,89.492 103.856,89.716 v2(104.394,90.254) ; v2(105.987,101.43) R67.1
  Bottom Layer w0.5: v2(104.394,90.254) 105.987,91.847 v2(105.987,101.43)
USIM_RST: R69.1 U7.14 | length 17.1
  Top Layer w0.5: v2(99.891,101.43) R69.1 ; v2(101.6,90.254) 102.255,89.599 U7.14
  Bottom Layer w0.5: v2(99.891,101.43) 99.891,91.963 v2(101.6,90.254)
USIM_VDD: C82.2 C83.2 C84.2 CARD1.C1 D5.6 U7.8 | length 47.1
  Top Layer w0.5: D5.6 105.969,110.381 C82.2 106.952,111.56 CARD1.C1
  Top Layer w0.6: U7.8 104.656,87.976 105.537,88.857 111.633,88.857 114.427,91.651 C83.2
  Top Layer w0.8: CARD1.C1 108.76,114.209 111.262,111.707 C84.2 C83.2
VDD_3V3: C23.1 C70.2 C75.2 C76.2 C77.1 L2.2 R55.2 SW1.2 U4.16 | length 39.4
  Top Layer w0.5: U4.16 68.575,76.914 C23.1
  Top Layer w0.8: v2(67.691,88.476) 70.612,85.555 70.612,78.951 70.231,78.57 C23.1
  Top Layer w1: R55.2 63.472,115.898 66.723,115.898 ; C70.2 70.612,115.898
  Bottom Layer w1: v2(67.691,88.476) 67.691,100.922 SW1.2
VDD_3V3_4G: C7.2 C39.2 C40.2 C67.2 C68.2 C79.2 D5.5 R59.2 R63.2 R64.2 SW1.1 U7.2 U7.24 U7.39 U7.41 U7.52 | length 157.9
  Top Layer w0.5: R59.2 83.185,105.786 ; C79.2 83.856,83.188 U7.52 ; 83.185,107.018 84.201,107.018 87.556,107.018 R63.2 ; U7.24 95.057,81.443 C67.2 ; D5.5 v2(105.893,109.431) C7.2@106.934,109.431 ; C68.2 107.579,81.247 v2(108.458,82.126) 107.056,83.528 U7.2
  Top Layer w1: R64.2 83.185,107.854 83.185,99.652 84.836,98.001 86.995,98.001 88.646,96.35 88.646,95.08 88.646,92.286 90.17,90.762 97.917,90.762 99.4,89.279 99.4,82.126
  Top Layer w3: SW1.1 73.787,95.334 78.105,91.016 78.105,84.666 80.645,82.126 97.536,82.126 v2(108.458,82.126)
  Bottom Layer w1: v2(105.893,109.431) 112.903,102.421 112.903,86.571 v2(108.458,82.126) v2@108.331,82.126
VDD_3V3_WIFI: C5.2 C6.2 R6.2 R7.2 R8.2 R9.2 SW1.3 U3.2 | length 99.5
  Top Layer w0.5: R9.2@56.515,72.99 58.039,72.99 v2(59.309,72.991) ; C6.2 C5.2
  Top Layer w1: U3.2 69.604,41.367 71.102,42.865 C5.2
  Top Layer w3: SW1.3 64.389,95.207 72.898,86.698 72.898,79.459 77.978,74.379 77.978,45.677 76.454,44.153 74.041,44.153
  Bottom Layer w0.5: v2(59.309,72.991) 59.318,72.982 v2(77.851,72.982)
VDD_24V: C4.2 C73.1 C74.1 D2.1 U41.3 | length 22.2
  Top Layer w1: C73.1 60.833,123.894
  Top Layer w2: D2.1 56.642,116.162 53.848,118.956 C74.1 55.357,123.894 C73.1
WIFI_3V3_RXD: R9.1 R10.2 U4.9 | length 26.4
  Top Layer w0.5: R10.2 v2(45.847,58.25) ; R9.1 56.642,74.625 v2(56.642,75.395) U4.9
  Bottom Layer w0.5: v2(45.847,58.25) 48.585,60.988 50.49,60.988 56.642,67.14 v2(56.642,75.395)
WIFI_3V3_TXD: R1.2 R8.1 U4.10 | length 34.7
  Top Layer w0.5: R1.2 v2(43.942,58.25) ; U4.10 57.785,77.041 v2(57.785,78.697) 57.785,74.752 R8.1
  Bottom Layer w0.5: v2(43.942,58.25) 43.942,58.631 47.714,62.403 49.873,62.403 54.991,67.521 54.991,75.903 v2(57.785,78.697)
pads on no net: CARD1.C6 U3.4 U3.5 U3.6 U3.7 U3.8 U3.9 U3.10 U3.11 U3.12 U3.13 U3.14 U3.16 U3.17 U3.18 U3.19 U3.20 U3.21 U3.22 U3.23 U3.24 U3.25 U3.26 U3.29 U3.30 U3.31 U3.32 U3.33 U3.34 U3.35 U3.36 U3.37 U7.0 U7.1 U7.3 U7.5 U7.6 U7.7 U7.13 U7.16 U7.17 U7.19 U7.20 U7.22 U7.25 U7.28 U7.30 U7.32 U7.33 U7.36 U7.38 U7.44 U7.45 U7.46 U7.47 U7.48 U7.49 U7.51 U41.5
copper on no net: | length 2.3
  Top Layer w0.6: 95.856,84.158 95.856,86.495

## Polygon pours and split planes (outlines as drawn)
DGND on Bottom Layer (solid): 38.1,38.1 38.1,128.778 118.364,128.778 118.491,128.651 118.491,38.354
DGND on Top Layer (solid): 38.1,38.1 38.1,128.778 118.364,128.778 118.491,128.651 118.491,38.354

## Keep-outs
Keep-Out Layer:
  lines w0.254: 38.227,41.981 ccw(c41.727,41.981) 41.727,38.481 ; 38.227,124.981 cw(c41.727,124.981) 41.727,128.481 ; 114.727,38.481 ccw(c114.727,41.981) 118.227,41.981 ; 114.727,128.481 cw(c114.727,124.981) 118.227,124.981

## Other copper
Top Layer:
  region net VDD_3V3_4G: 107.356,85.494 106.756,85.494 106.806,84.744 107.306,84.744
  region net VDD_3V3_4G: 84.155,85.494 83.556,85.494 83.606,84.744 84.106,84.744
  region net LED2_2: 87.556,87.496 88.156,87.496 88.106,88.246 87.606,88.246
  region net EC20_VDD_EXT: 103.157,95.695 103.757,95.695 103.757,96.525 103.157,96.525
  region net EC20_RXD_1V8: 95.156,95.695 95.756,95.695 95.706,96.445 95.206,96.445
  region net USIM_DATA: 103.556,87.496 104.155,87.496 104.105,88.246 103.605,88.246
  region net EC20_TXD_1V8: 87.123,101.345 87.877,100.348 88.156,101.222 87.852,101.625
  region net EC20_TXD_1V8: 87.877,100.245 86.877,100.245 87.126,99.906 87.626,99.906
  region net LED1_1: 75.298,48.217 74.308,48.217 74.553,47.467 75.053,47.467
  region net LED1_1: 74.38,47.104 75.428,47.104 75.053,47.854 74.553,47.854
  region net VDD_3V3_WIFI: 74.42,42.366 74.42,43.366 73.67,43.115 73.67,42.615
  region net VDD_3V3_WIFI: 73.107,43.366 73.107,42.366 73.857,42.615 73.857,43.115
  region net C70_1: 60.537,118.097 61.637,118.097 61.403,118.847 60.903,118.847
  region net C70_1: 61.637,118.097 61.637,117.097 63.137,117.097 63.137,118.097
  region net USIM_DATA: 106.537,102.162 105.437,102.162 105.737,101.43 106.237,101.43
  region net DATA: 105.437,104.762 106.537,104.762 106.237,105.494 105.737,105.494
  region net USIM_RST: 100.441,102.162 99.341,102.162 99.641,101.43 100.141,101.43
  region net RST: 99.341,104.762 100.441,104.762 100.141,105.436 99.641,105.436
  region net USIM_CLK: 103.547,102.162 102.447,102.162 102.747,101.412 103.247,101.412
  region net CLK: 102.447,104.762 103.547,104.762 103.316,105.494 102.816,105.494
  region net VDD_24V: 55.342,109.91 57.942,109.91 57.642,112.91 55.642,112.91
  region net F1_2: 57.942,103.11 55.342,103.11 55.642,100.836 57.642,100.836
  region net R65_2: 92.295,106.393 92.995,106.393 92.894,107.143 92.394,107.143
  region net EC20_RXD_1V8: 91.345,107.643 91.345,108.893 90.658,108.518 90.658,108.018
  region net Q8_1: 85.887,106.384 85.732,105.143 86.412,104.54 86.491,105.168
  region net EC20_TXD_1V8: 87.787,106.384 87.632,105.143 88.312,104.539 88.391,105.168
  region net R66_2: 86.682,108.893 86.837,107.652 87.418,108.845 87.202,109.336
  region net LED2_2: 82.029,99.398 81.039,99.398 81.284,98.763 81.784,98.763
  region net R59_1: 81.039,102.192 82.029,102.192 81.784,102.942 81.284,102.942
  region net RST: 104.028,108.206 104.028,108.756 103.95,108.631 103.95,108.331
  region net RST: 105.028,108.756 105.028,108.206 105.697,108.231 105.697,108.731
  region net RST: 105.028,108.206 104.028,108.206 104.279,108.042 104.779,108.042
  region net VDD_3V3_4G: 105.028,109.706 105.028,109.156 105.778,109.181 105.778,109.681
  region net USIM_VDD: 105.028,110.656 105.028,110.106 105.778,110.131 105.778,110.631
  region net DATA: 101.228,110.106 101.228,110.656 100.65,110.631 100.65,110.131
  region net DATA: 101.228,110.106 101.228,110.656 100.478,110.631 100.478,110.131
  region net CLK: 102.228,108.756 102.228,108.206 102.304,108.331 102.304,108.631
  region net CLK: 101.228,108.206 101.228,108.756 100.592,108.731 100.592,108.231
  region net Q8_1: 86.878,103.885 87.878,103.885 87.628,103.927 87.128,103.927
  region net C70_1: 61.463,120.502 60.843,120.502 60.903,119.752 61.403,119.752
  region net RX1: 51.659,70.865 52.659,70.865 52.409,71.615 51.909,71.615
  region net R13_2: 54.259,70.865 54.259,69.765 55.009,70.065 55.009,70.565
  region net TX1: 52.659,67.733 51.659,67.733 51.909,66.983 52.409,66.983
  region net R14_2: 54.259,68.833 54.259,67.733 55.009,68.033 55.009,68.533
  region net R65_2: 93.085,109.897 92.085,109.897 92.394,109.147 92.894,109.147
  region net R65_2: 92.085,110.997 93.085,110.997 92.835,111.747 92.335,111.747
  region net VDD_3V3_4G: 91.237,109.897 90.485,110.896 90.205,110.021 90.509,109.617
  region net R66_2: 87.878,109.897 86.878,109.897 87.128,109.159 87.628,109.159
  region net R66_2: 86.878,110.997 87.878,110.997 87.627,111.747 87.127,111.747
  region net VDD_3V3_4G: 86.278,109.897 85.278,110.997 84.379,109.755 85.053,109.014
  region net TX2: 52.532,80.306 51.532,80.306 51.782,79.556 52.282,79.556
  region net U4_7: 54.132,81.406 54.132,80.306 54.882,80.606 54.882,81.106
  region net EC20_RXD_1V8: 90.485,100.348 91.238,101.345 90.509,101.625 90.205,101.222
  region net EC20_RXD_1V8: 91.485,100.245 90.485,100.245 90.735,100.107 91.235,100.107
  region net EC20_VDD_EXT: 93.085,101.345 93.085,100.245 93.985,100.495 93.985,101.095
  region net 4G_3V3_RXD: 90.485,112.377 90.485,113.477 89.735,113.237 89.735,112.737
  region net R65_2: 93.085,112.377 92.085,112.377 92.335,111.627 92.835,111.627
  region net U3_3: 72.007,46.104 72.007,47.104 71.666,46.854 71.666,46.354
  region net U3_3: 72.007,47.104 73.107,47.104 72.808,47.854 72.308,47.854
  region net R59_1: 82.084,103.686 80.984,103.686 81.284,102.936 81.784,102.936
  region net VDD_3V3_4G: 82.084,106.286 82.084,105.286 82.834,105.536 82.834,106.036
  region net RX2: 51.532,83.692 52.532,83.692 52.282,84.442 51.782,84.442
  region net U4_8: 54.132,83.692 53.957,82.592 54.301,82.335 54.526,82.817
  region net 4G_3V3_TXD: 85.277,112.377 85.277,113.477 84.527,113.237 84.527,112.737
  region net R66_2: 87.877,112.377 86.877,112.377 87.127,111.627 87.627,111.627
  region net F1_2: 55.292,99.686 55.292,101.986 52.292,101.861 52.292,99.861
  region net F1_2: 55.292,101.986 57.992,101.986 57.642,104.11 55.642,104.11
  region net C70_1: 62.823,117.097 62.823,118.097 61.323,118.097 61.323,117.097
  region net C70_1: 63.923,118.097 63.923,117.097 65.423,117.097 65.423,118.097
  region net RST: 106.55,106.952 107.304,107.949 106.575,108.229 106.27,107.826
  region net DATA: 99.825,111.006 99.825,110.024 100.575,110.131 100.575,110.631
  region net VDD_3V3: 65.857,77.539 65.857,76.289 66.607,76.664 66.607,77.164
  region net R14_2: 63.317,76.039 62.667,76.039 62.742,75.289 63.242,75.289
  region net R13_2: 62.047,76.039 61.397,76.039 61.472,75.289 61.972,75.289
  region net 4G_3V3_RXD: 60.127,77.789 60.777,77.789 60.702,78.539 60.202,78.539
  region net 4G_3V3_TXD: 58.857,77.789 59.507,77.789 59.432,78.539 58.932,78.539
  region net WIFI_3V3_RXD: 56.967,76.039 56.317,76.039 56.392,75.395 56.892,75.395
  region net U4_8: 56.317,81.887 56.317,83.137 55.567,82.762 55.567,82.262
  region net U4_7: 58.237,81.637 57.587,81.637 57.662,81.349 58.162,81.349
  region net C20_2: 58.857,83.387 59.507,83.387 59.432,83.777 58.932,83.777
  region net C21_1: 60.127,83.387 60.777,83.387 60.702,84.137 60.202,84.137
  region net C21_2: 61.397,83.387 62.047,83.387 61.972,83.904 61.472,83.904
  region net C22_2: 62.667,83.387 63.317,83.387 63.242,83.904 62.742,83.904
  region net C19_1: 64.587,81.637 63.937,81.637 64.012,81.354 64.512,81.354
  region net C22_1: 65.207,83.387 65.857,83.387 65.782,84.137 65.282,84.137
  region net VDD_3V3_4G: 106.087,81.748 106.087,80.748 106.837,80.997 106.837,81.497
  region net RX1: 52.432,71.924 51.534,71.924 51.909,71.174 52.409,71.174
  region net RX1: 51.432,71.924 51.432,73.024 51.054,72.874 51.054,72.074
  region net TX1: 51.432,65.701 51.432,66.801 50.232,66.651 50.232,65.851
  region net TX1: 51.534,66.801 52.432,66.801 52.409,67.551 51.909,67.551
  region net USIM_VDD: 107.304,110.913 106.55,111.91 106.27,111.036 106.575,110.634
  region net USIM_VDD: 106.55,112.013 107.55,112.013 107.202,112.763 106.702,112.763
  region net C22_2: 64.751,85.894 63.751,85.894 64.002,85.164 64.502,85.164
  region net C22_1: 66.551,85.894 65.551,85.894 65.8,85.144 66.3,85.144
  region net C21_2: 62.487,85.894 61.487,85.894 61.736,85.144 62.236,85.144
  region net C21_1: 60.687,85.894 59.687,85.894 59.938,85.144 60.438,85.144
  region net C20_2: 58.423,85.894 57.423,85.894 57.672,85.144 58.172,85.144
  region net C19_1: 68.284,80.345 68.284,81.345 67.534,81.096 67.534,80.596
  region net VDD_3V3_4G: 81.468,81.748 82.465,80.994 82.745,81.723 82.342,82.028
  region net U3_3: 73.107,48.099 72.007,48.099 72.308,47.349 72.808,47.349
  region net TX2: 51.432,79.12 52.432,79.12 52.282,79.87 51.782,79.87
  region net TX2: 51.432,78.02 51.432,79.12 50.232,78.97 50.232,78.17
  region net RX2: 52.432,84.751 51.432,84.751 51.782,84.001 52.282,84.001
  region net RX2: 51.432,84.751 51.432,85.851 50.232,85.701 50.232,84.901
  region net VDD_3V3_4G: 94.763,81.685 95.682,81.685 95.307,82.435 94.807,82.435
  region net VDD_3V3: 68.284,77.674 69.384,76.674 69.98,77.754 69.388,78.292
  region net U3_28: 48.666,52.347 48.666,53.247 47.916,53.047 47.916,52.547
  region net U3_27: 48.666,53.617 48.666,54.517 47.916,54.317 47.916,53.817
  region net U3_3: 67.666,43.087 67.666,42.187 68.416,42.387 68.416,42.887
  region net DATA: 101.053,113.408 100.152,113.408 100.352,112.658 100.852,112.658
  region net CLK: 102.247,113.408 101.497,113.408 101.722,112.958 102.022,112.958
  region net RST: 104.787,113.408 104.037,113.408 104.262,112.958 104.562,112.958
  region net USIM_VDD: 107.403,113.408 106.502,113.408 106.702,112.658 107.202,112.658
  region net USIM_VDD: 107.403,115.008 107.403,113.408 108.603,113.809 108.603,114.609
  region net U3_27: 46.279,55.995 45.415,55.189 46.194,54.89 46.56,55.231
  region net WIFI_3V3_RXD: 45.415,57.502 46.279,57.502 46.097,58.25 45.597,58.25
  region net WIFI_3V3_RXD: 56.947,74.901 56.083,74.901 56.392,75.395 56.892,75.395
  region net VDD_3V3_WIFI: 56.947,73.394 56.947,72.588 57.697,72.74 57.697,73.24
  region net VDD_3V3_WIFI: 57.607,72.588 57.607,73.394 56.857,73.24 56.857,72.74
  region net VDD_3V3_WIFI: 58.471,73.394 58.471,72.588 59.221,72.74 59.221,73.24
  region net U3_28: 44.374,55.995 43.51,55.189 44.289,54.89 44.655,55.231
  region net WIFI_3V3_TXD: 43.51,57.502 44.374,57.502 44.192,58.25 43.692,58.25
  region net VDD_3V3_4G: 106.55,108.881 106.55,109.981 105.893,109.681 105.893,109.181
  region net USIM_VDD: 112.818,112.206 112.818,111.206 114.018,111.307 114.018,112.107
  region net USIM_VDD: 111.718,111.206 111.718,112.206 111.262,112.107 111.262,111.307
  region net USIM_VDD: 114.977,111.206 113.877,111.206 114.127,110.306 114.727,110.306
  region net USIM_VDD: 113.877,111.206 113.877,112.206 112.677,112.107 112.677,111.307
  region net VDD_3V3: 68.09,88.501 67.666,88.077 67.793,87.808 68.359,88.374
  region net VDD_3V3_WIFI: 59.045,72.69 59.044,73.29 58.764,73.24 58.765,72.74
  region net WIFI_3V3_RXD: 46.147,57.985 45.547,57.985 45.597,57.706 46.097,57.706
  region net WIFI_3V3_TXD: 44.242,57.985 43.642,57.985 43.692,57.706 44.192,57.706
  region net VDD_3V3_4G: 106.158,109.131 106.158,109.731 106.438,109.681 106.438,109.181
  region net VDD_3V3_4G: 105.629,109.131 105.629,109.731 105.349,109.681 105.349,109.181
  region net VDD_3V3_4G: 108.483,81.727 108.059,82.151 107.896,81.918 108.25,81.564
  region net VDD_3V3_4G: 108.483,82.525 108.059,82.101 107.896,82.334 108.25,82.688
  region net WIFI_3V3_RXD: 56.942,75.66 56.342,75.66 56.392,75.94 56.892,75.94
  region net WIFI_3V3_RXD: 56.942,75.13 56.342,75.13 56.392,74.851 56.892,74.851
  region net WIFI_3V3_TXD: 58.085,78.432 57.485,78.432 57.535,78.153 58.035,78.153
  region net WIFI_3V3_TXD: 58.085,78.432 57.485,78.432 57.535,78.153 58.035,78.153
  region net 4G_3V3_TXD: 59.482,78.432 58.882,78.432 58.932,78.153 59.432,78.153
  region net 4G_3V3_RXD: 60.752,78.432 60.152,78.432 60.202,78.153 60.702,78.153
  region net 4G_3V3_TXD: 84.466,112.687 84.466,113.287 84.746,113.237 84.746,112.737
  region net 4G_3V3_RXD: 89.8,112.687 89.8,113.287 90.08,113.237 90.08,112.737
  region net DATA: 100.883,110.713 100.81,110.117 101.094,110.131 101.155,110.631
  region net DATA: 100.892,110.702 100.293,110.721 100.352,111 100.852,110.983
  region net DATA: 100.883,110.713 100.81,110.117 101.094,110.131 101.155,110.631
  region net DATA: 100.358,110.117 100.285,110.713 100.013,110.631 100.074,110.131
  region net USIM_DATA: 104.419,89.855 103.995,90.279 103.832,90.046 104.186,89.692
  region net USIM_RST: 101.999,90.279 101.575,89.855 101.808,89.692 102.162,90.046
  region net USIM_CLK: 103.356,90.751 102.756,90.752 102.805,90.472 103.305,90.471
  region net USIM_DATA: 106.287,101.695 105.687,101.694 105.737,101.974 106.237,101.975
  region net USIM_RST: 100.191,101.695 99.591,101.694 99.641,101.974 100.141,101.975
  region net CLK: 100.855,108.181 100.855,108.781 101.135,108.731 101.135,108.231
  region net CLK: 100.326,108.781 100.326,108.181 100.046,108.231 100.046,108.731
  region net CLK: 103.366,105.229 102.766,105.23 102.816,104.95 103.316,104.949
  region net USIM_CLK: 103.297,101.626 102.697,101.626 102.747,101.906 103.247,101.906
  region net DATA: 106.287,105.229 105.687,105.23 105.737,104.95 106.237,104.949
  region net F1_2: 50.328,100.111 50.328,101.611 51.028,101.861 51.028,99.861
  region net F1_2: 50.417,101.522 48.917,101.523 48.667,102.223 50.667,102.222
  region net TX2: 44.804,77.432 43.32,78.917 44.175,78.853 44.74,78.287
  region net RX2: 44.804,81.395 43.319,82.879 44.471,83.113 45.037,82.548
  region net PGND: 44.677,106.828 43.193,105.343 43.921,104.685 45.335,106.099
  region net PGND: 43.368,105.343 41.883,106.828 41.225,106.1 42.639,104.685
  region net PGND: 44.33,105.814 42.23,105.814 42.28,104.834 44.28,104.834
  region net JP1_1: 44.206,113.612 44.206,115.712 45.186,115.662 45.186,113.662
  region net TX1: 44.334,63.136 44.333,65.236 45.313,64.586 45.313,63.786
  region net RX1: 44.334,67.098 44.333,69.198 45.313,68.548 45.313,67.748
  region net F1_2: 50.195,107.197 51.256,106.137 50.938,105.465 49.523,106.879
  region net JP1_1: 51.695,112.173 52.756,113.233 52.437,113.905 51.023,112.491
  pour cut-out: 69.469,126.957 81.661,126.957 81.661,114.765 69.469,114.765 69.469,126.83
  pour cut-out: 50.736,38.597 50.736,44.883 56.515,44.788 56.515,38.565
  pour cut-out: 76.835,38.438 76.835,44.153 79.121,47.201 79.756,45.931 79.756,38.438
  region net U41_6: 62.738,121.75 64.897,121.75 65.532,122.512 67.31,122.512 67.564,122.258 67.564,120.734 67.183,120.48 62.738,120.48 62.738,121.75
  region net U41_2: 62.103,123.912 61.722,124.925 61.722,125.433 62.738,126.576 71.247,126.576 72.898,127.846 78.359,127.846 78.867,127.338 78.867,124.29 77.597,122.893 65.532,122.893 65.151,123.274 65.151,124.29 64.262,125.052 62.865,125.052 62.484,124.671 62.103,123.912
  region net VDD_3V3: 67.564,100.795 67.945,100.414 70.231,100.414 70.739,101.176 70.739,103.208 73.406,106.383 73.406,111.971 74.041,112.733 77.343,112.733 78.486,113.876 78.486,117.432 77.724,118.321 68.58,118.321 67.818,117.305
  rectangle net VDD_3V3_4G: 88.011,93.683 89.281,95.715
  rectangle net VDD_3V3_WIFI: 71.628,42.248 75.819,45.55
  rectangle net DGND: 41.084,108.606 45.783,112.543
Bottom Layer:
  region net VDD_3V3_WIFI: 77.586,72.682 77.586,73.282 77.306,73.232 77.306,72.732
  region net VDD_3V3_WIFI: 59.578,73.286 59.569,72.687 59.85,72.732 59.857,73.232
  region net WIFI_3V3_RXD: 46.246,58.225 45.822,58.649 46.055,58.812 46.409,58.458
  region net WIFI_3V3_TXD: 43.723,58.585 44.301,58.426 44.364,58.699 43.809,58.851
  region net EC20_VDD_EXT: 92.318,101.765 92.318,102.365 92.038,102.465 92.038,101.665
  region net EC20_VDD_EXT: 85.99,101.765 85.99,102.365 86.27,102.465 86.27,101.665
  region net WIFI_3V3_RXD: 56.942,75.13 56.342,75.13 56.392,74.851 56.892,74.851
  region net WIFI_3V3_TXD: 57.81,78.298 57.386,78.722 57.223,78.489 57.577,78.135
  region net 4G_3V3_TXD: 59.581,78.672 59.157,79.096 59.39,79.259 59.744,78.905
  region net 4G_3V3_RXD: 60.717,78.397 60.717,78.997 60.997,78.947 60.997,78.447
  region net 4G_3V3_TXD: 84.501,112.722 83.901,112.722 83.951,112.443 84.451,112.443
  region net 4G_3V3_RXD: 89.835,112.722 89.235,112.722 89.285,112.443 89.785,112.443
  region net DATA: 100.849,110.147 100.849,110.747 101.034,110.697 101.034,110.197
  region net USIM_DATA: 104.793,90.229 104.369,90.653 104.602,90.816 104.956,90.462
  region net USIM_RST: 101.625,90.653 101.201,90.229 101.038,90.462 101.392,90.816
  region net USIM_CLK: 103.326,91.312 102.729,91.246 102.747,91.53 103.247,91.585
  region net USIM_DATA: 106.287,101.165 105.687,101.165 105.737,100.886 106.237,100.886
  region net USIM_RST: 100.191,101.165 99.591,101.165 99.641,100.886 100.141,100.886
  region net CLK: 100.891,108.217 100.291,108.216 100.342,107.97 100.842,107.971
  region net CLK: 103.091,105.893 102.667,105.469 102.504,105.702 102.858,106.056
  region net USIM_CLK: 103.297,101.097 102.697,101.097 102.747,100.817 103.247,100.817
  region net DATA: 106.012,105.893 105.588,105.469 105.425,105.702 105.778,106.056
  region net PGND: 43.338,121.874 38.443,123.771 39.005,120.926 41.005,120.15
  region net PGND: 42.354,105.69 42.354,107.79 41.68,107.74 41.68,105.74
  region net VDD_3V3: 69.166,101.072 67.84,102.397 67.531,101.469 68.238,100.762
  pour cut-out: 50.736,38.597 50.736,44.883 56.515,44.788 56.515,38.565

## Silkscreen, mask and mechanical layers (free items; w line width, h text height)
Top Overlay:
  lines w0.6 net S$10309: 65.278,96.541 66.548,97.811 ; 73.152,95.461 74.422,96.731
  lines w0.6 net S$10311: 65.278,96.541 66.218,95.695 66.548,95.398 ; 73.152,97.874 74.422,96.731
  lines w0.6 net S$10313: 65.278,96.541 68.961,96.541 ; 70.739,96.731 74.422,96.731
  text "POWER" at 47.633,117.432 h1 r270
  text "GND" at 47.506,111.971 h1 r270
  text "PE" at 47.506,107.272 h1 r270
  text "4G" at 75.438,94.699 h2.03
  text "WIFI" at 59.182,94.572 h2.03
  text "WIFI-RS232" at 38.762,87.481 h1.5
  text "DGND" at 47.687,87.351 h1 r270
  text "RX2" at 47.66,82.77 h1 r270
  text "TX2" at 47.66,78.579 h1 r270
  text "DGND" at 47.66,73.88 h1 r270
  text "RX1" at 47.66,69.181 h1 r270
  text "TX1" at 47.66,65.371 h1 r270
  text "20211019" at 62.484,64.37 h3
  text "XH-SMJ-02" at 51.816,59.671 h3
  text "4G-RS232" at 38.87,59.069 h1.5

## Text inside footprints (layer, text, board x,y; h text height)
CARD1: Top Overlay "OPEN" at 108.228,125.744 h0.7 r270; Top Overlay "LOCK" at 99.42,123.328 h0.7 r90